# Altium PCB SkayboardRev2.PcbDoc
Units mil, origin at the board's own origin, x right, y up, seen from the top; angles counter-clockwise.
Board outline 13972.57 x 4222.54 mil, 2 copper layers (Top Layer, Bottom Layer); 100 components, 109 nets, 1014 pads, 162 vias.
Unrouted connection lines stored in the file: 145.
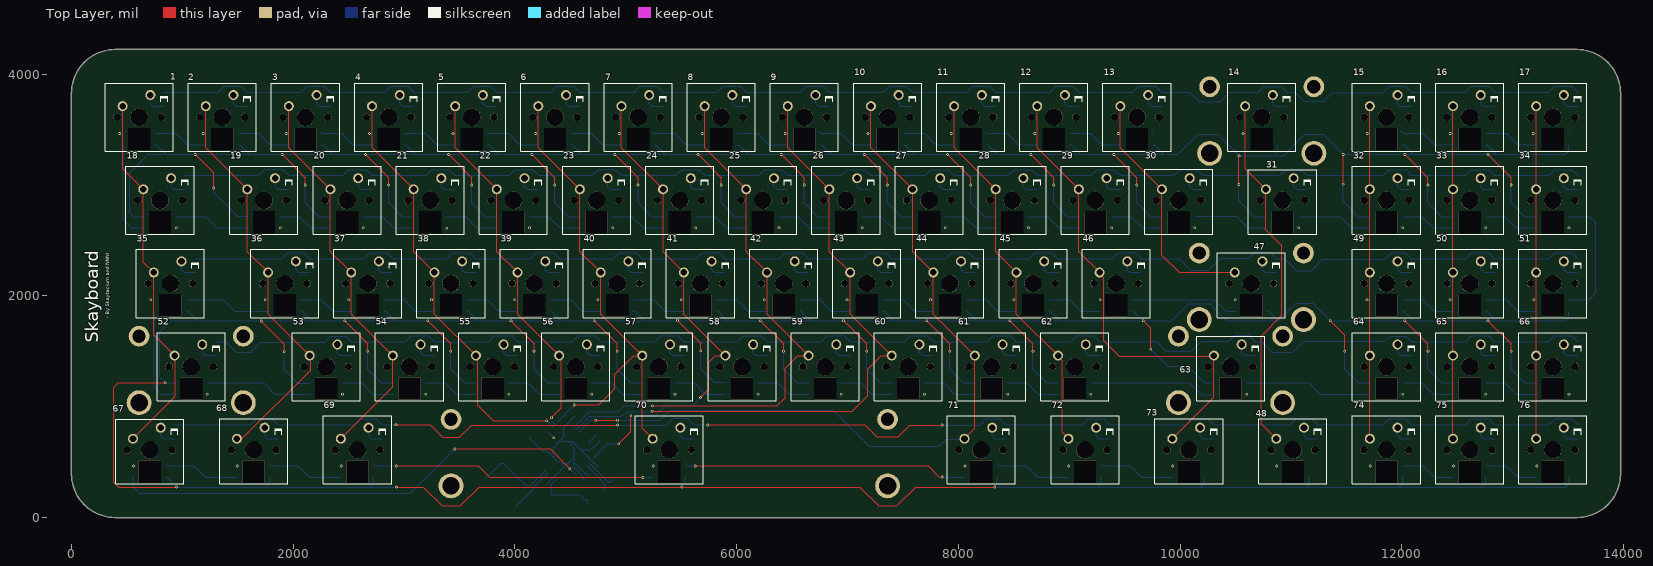
[diagram p0: Top Layer view]
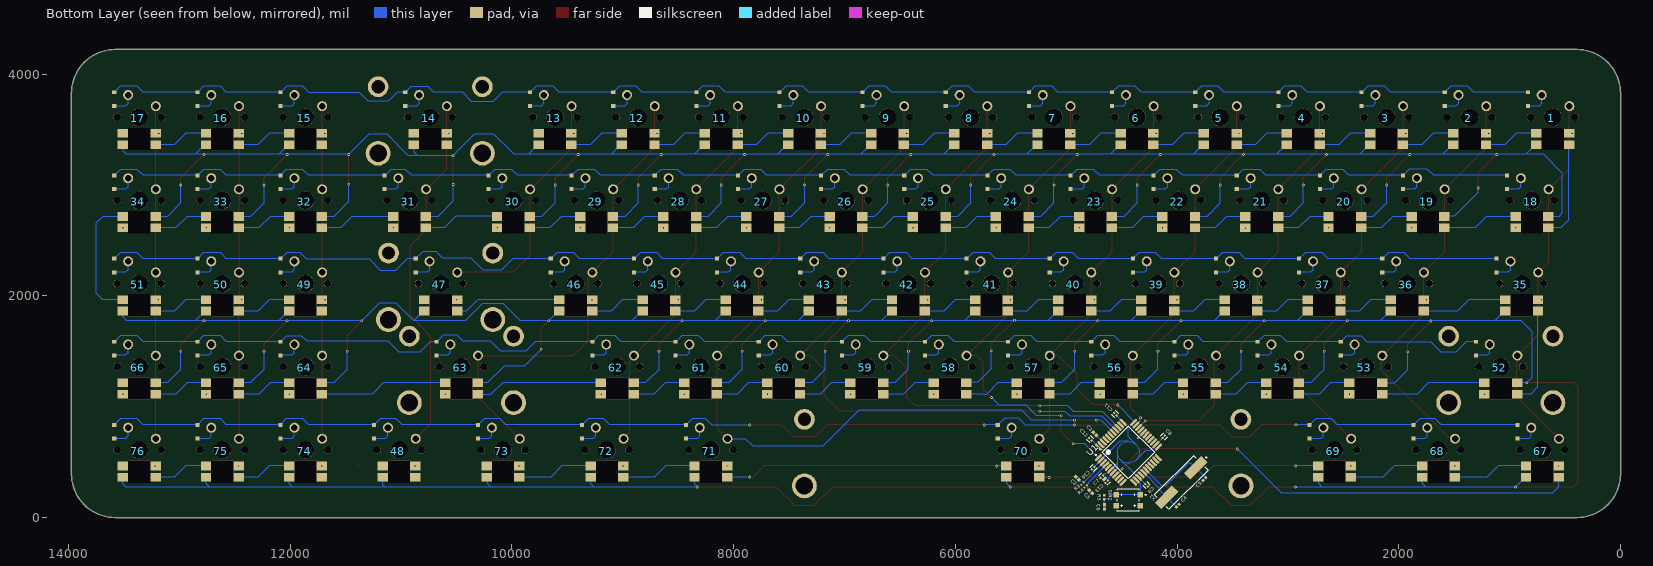
[diagram p1: Bottom Layer view, seen from below]

## Layer stack, top to bottom
Top Solder: solder mask 0.4, Solder Resist, Dk 3.5
Top Layer: signal copper 1.4
Dielectric 1: dielectric 12.6, FR-4, Dk 4.8
Bottom Layer: signal copper 1.4
Bottom Solder: solder mask 0.4, Solder Resist, Dk 3.5

## Board outline
58.09,188.06 42.95,215.02 30.04,243.12 19.35,272.1 10.94,301.83 4.92,332.15 1.29,362.86 0.04,393.78 0.09,3828.78 1.29,3859.71 4.92,3890.42 10.94,3920.74 19.35,3950.47 30.04,3979.52 42.95,4007.55 58.09,4034.52 75.23,4060.23 94.38,4084.52 115.38,4107.2 138.06,4128.22 162.37,4147.36 188.08,4164.52 215.04,4179.64 243.09,4192.55 272.12,4203.26 301.85,4211.65 332.18,4217.67 362.89,4221.33 393.81,4222.55 13578.87,4222.51 13609.73,4221.33 13640.44,4217.67 13670.75,4211.65 13700.52,4203.26 13729.5,4192.55 13757.57,4179.64 13784.53,4164.52 13810.24,4147.36 13834.5,4128.22 13857.25,4107.2 13878.24,4084.52 13897.33,4060.23 13914.53,4034.52 13929.69,4007.55 13942.61,3979.52 13953.31,3950.47 13961.62,3920.74 13967.76,3890.42 13971.35,3859.71 13972.61,3828.78 13972.61,393.78 13971.35,362.86 13967.76,332.15 13961.62,301.83 13953.31,272.1 13942.61,243.12 13929.69,215.02 13914.53,188.06 13897.33,162.34 13878.24,138.09 13857.25,115.36 13834.5,94.36 13810.24,75.21 13784.53,58.06 13757.57,42.93 13729.5,30.02 13700.52,19.33 13670.75,10.92 13640.44,4.9 13609.73,1.26 13578.87,0.01 393.81,0.07 362.89,1.26 332.18,4.9 301.85,10.92 272.12,19.33 243.09,30.02 215.04,42.93 188.08,58.06 162.37,75.21 138.06,94.36 115.38,115.36 94.38,138.09 75.23,162.34

## Design rules (kind name [scope] priority, off if disabled: settings)
BoardOutlineClearance [All] p1: gap=10 ignorepadtopadclearanceinfootprint=FALSE except(-1: Arc-OutlineEdge; 0: Arc-SplitContinuation Track-SplitContinuation SMDPad-SplitContinuation THPad-SplitContinuation Via-SplitContinuation Fill-SplitContinuation Poly-SplitContinuation Region-SplitContinuation Text-SplitContinuation)
Clearance [All] p1: gap=10 ignorepadtopadclearanceinfootprint=FALSE except(0: Arc-Hole Track-Hole SMDPad-Hole THPad-Hole Via-Hole Fill-Hole Poly-Hole Region-Hole Text-Hole)
PolygonConnect [All] p1: connectstyle=Relief reliefconductorwidth=10 reliefentries=4 polygonreliefangle="90 Angle" airgapwidth=10
RoutingVias [All] p1: holewidth=28 width=50 viastyle="Through Hole" minholewidth=28 minwidth=50 maxholewidth=28 maxwidth=50
SolderMaskExpansion [All] p1: expansion=4 istentingtop=FALSE
Width [All] p1: maxlimit=10 minlimit=10 preferedwidth=10
30 further rules are at their usual default settings.

## Components (designator, comment, footprint, x,y, rotation, side; value= is the part's Value field where it differs from the comment)
1 "Skey_LM" MX_RGB_Normal 611.29,3611.31 r0 top
2 "Skey_LM" MX_RGB_Normal 1361.31,3611.29 r0 top
3 "Skey_LM" MX_RGB_Normal 2111.31,3611.29 r0 top
4 "Skey_LM" MX_RGB_Normal 2861.31,3611.29 r0 top locked
5 "Skey_LM" MX_RGB_Normal 3611.31,3611.29 r0 top
6 "Skey_LM" MX_RGB_Normal 4361.25,3611.29 r0 top
7 "Skey_LM" MX_RGB_Normal 5111.29,3611.32 r0 top
8 "Skey_LM" MX_RGB_Normal 5861.33,3611.29 r0 top
9 "Skey_LM" MX_RGB_Normal 6611.33,3611.29 r0 top
10 "Skey_LM" MX_RGB_Normal 7361.33,3611.29 r0 top
11 "Skey_LM" MX_RGB_Normal 8111.33,3611.29 r0 top
12 "Skey_LM" MX_RGB_Normal 8861.33,3611.29 r0 top
13 "Skey_LM" MX_RGB_Normal 9611.33,3611.29 r0 top
14 "Skey_LM" MX_RGB_Normal 10736.33,3611.29 r0 top
15 "Skey_LM" MX_RGB_Normal 11861.33,3611.29 r0 top
16 "Skey_LM" MX_RGB_Normal 12611.3,3611.31 r0 top
17 "Skey_LM" MX_RGB_Normal 13361.33,3611.29 r0 top
18 "Skey" MX_RGB_Normal 798.78,2861.26 r0 top
19 "Skey" MX_RGB_Normal 1736.31,2861.29 r0 top
20 "Skey" MX_RGB_Normal 2486.31,2861.29 r0 top
21 "Skey" MX_RGB_Normal 3236.31,2861.29 r0 top
22 "Skey" MX_RGB_Normal 3986.32,2861.29 r0 top
23 "Skey" MX_RGB_Normal 4736.33,2861.29 r0 top
24 "Skey" MX_RGB_Normal 5486.33,2861.29 r0 top
25 "Skey" MX_RGB_Normal 6236.33,2861.29 r0 top
26 "Skey" MX_RGB_Normal 6986.33,2861.29 r0 top
27 "Skey" MX_RGB_Normal 7736.33,2861.29 r0 top
28 "Skey" MX_RGB_Normal 8486.33,2861.29 r0 top
29 "Skey" MX_RGB_Normal 9236.33,2861.29 r0 top
30 "Skey" MX_RGB_Normal 9986.33,2861.29 r0 top
31 "Skey" MX_RGB_Normal 10923.79,2861.27 r0 top
32 "Skey" MX_RGB_Normal 11861.33,2861.29 r0 top
33 "Skey" MX_RGB_Normal 12611.33,2861.29 r0 top
34 "Skey" MX_RGB_Normal 13361.33,2861.29 r0 top
35 "Skey_LM" MX_RGB_Normal 892.53,2111.25 r0 top
36 "Skey_LM" MX_RGB_Normal 1923.79,2111.26 r0 top
37 "Skey_LM" MX_RGB_Normal 2673.79,2111.26 r0 top
38 "Skey_LM" MX_RGB_Normal 3423.79,2111.26 r0 top
39 "Skey_LM" MX_RGB_Normal 4173.79,2111.26 r0 top
40 "Skey_LM" MX_RGB_Normal 4923.79,2111.27 r0 top
41 "Skey_LM" MX_RGB_Normal 5673.79,2111.27 r0 top
42 "Skey_LM" MX_RGB_Normal 6423.79,2111.27 r0 top
43 "Skey_LM" MX_RGB_Normal 7173.79,2111.27 r0 top
44 "Skey_LM" MX_RGB_Normal 7923.79,2111.27 r0 top
45 "Skey_LM" MX_RGB_Normal 8673.79,2111.27 r0 top
46 "Skey_LM" MX_RGB_Normal 9423.79,2111.27 r0 top
47 "Skey_LM" MX_RGB_Normal 10642.53,2111.27 r0 top
48 "Skey_LM" MX_RGB_Normal 11017.53,611.27 r0 top
49 "Skey_LM" MX_RGB_Normal 11861.33,2111.29 r0 top
50 "Skey_LM" MX_RGB_Normal 12611.33,2111.29 r0 top
51 "Skey_LM" MX_RGB_Normal 13361.33,2111.29 r0 top
52 "Skey" MX_RGB_Normal 1080.03,1361.26 r0 top
53 "Skey" MX_RGB_Normal 2298.79,1361.26 r0 top
54 "Skey" MX_RGB_Normal 3048.79,1361.26 r0 top
55 "Skey" MX_RGB_Normal 3798.79,1361.27 r0 top
56 "Skey" MX_RGB_Normal 4548.79,1361.27 r0 top
57 "Skey" MX_RGB_Normal 5298.79,1361.27 r0 top
58 "Skey" MX_RGB_Normal 6048.79,1361.27 r0 top
59 "Skey" MX_RGB_Normal 6798.79,1361.27 r0 top
60 "Skey" MX_RGB_Normal 7548.79,1361.27 r0 top
61 "Skey" MX_RGB_Normal 8298.79,1361.27 r0 top
62 "Skey" MX_RGB_Normal 9048.79,1361.27 r0 top
63 "Skey" MX_RGB_Normal 10455.05,1361.27 r0 top
64 "Skey" MX_RGB_Normal 11861.33,1361.29 r0 top
65 "Skey" MX_RGB_Normal 12611.33,1361.29 r0 top
66 "Skey" MX_RGB_Normal 13361.33,1361.29 r0 top
67 "Skey_LM" MX_RGB_Normal 705.03,611.26 r0 top
68 "Skey_LM" MX_RGB_Normal 1642.54,611.26 r0 top
69 "Skey_LM" MX_RGB_Normal 2580.04,611.26 r0 top
70 "Skey_LM" MX_RGB_Normal 5392.53,611.27 r0 top
71 "Skey_LM" MX_RGB_Normal 8205.05,611.27 r0 top
72 "Skey_LM" MX_RGB_Normal 9142.53,611.27 r0 top
73 "Skey_LM" MX_RGB_Normal 10080.05,611.27 r0 top
74 "Skey_LM" MX_RGB_Normal 11861.33,611.29 r0 top
75 "Skey_LM" MX_RGB_Normal 12611.33,611.29 r0 top
76 "Skey_LM" MX_RGB_Normal 13361.33,611.29 r0 top
C1 "100nF" CAPC1050X55X23ML05T13 4742.27,757.73 r225 bottom
C2 "47pF" CAPC1005X55X30ML05T10 4899.75,356.16 r45 bottom
C3 "47pF" CAPC1005X55X30ML05T10 4777.7,234.11 r45 bottom
C4 "22pF" CAPC1005X56X25NL10T15 3994.23,108.13 r315 bottom
C5 "22pF" CAPC1005X56X25NL10T15 3754.08,348.29 r135 bottom
C6 "100nF" CAPC1050X55X23ML05T13 4655.65,96.32 r270 bottom
C7 "100nF" FP-C0402-BB-MFG 4679.27,367.97 r315 bottom value="0.10 μF"
C8 "100nF" FP-C0402-BB-MFG 4120.22,730.17 r135 bottom value="0.10 μF"
C9 "100nF" FP-C0402-BB-MFG 4274.44,289.91 r225 bottom value="0.10 μF"
C10 "100nF" FP-C0402-BB-MFG 4758.01,446.71 r315 bottom value="0.10 μF"
C11 "100nF" FP-C0402-BB-MFG 4557.23,930.96 r45 bottom value="0.10 μF"
C12 "100nF" FP-C0402-BB-MFG 4781.64,706.55 r45 bottom value="0.10 μF"
C13 "100nF" FP-C0402-BB-MFG 4635.97,324.66 r315 bottom value="0.10 μF"
R3 "22R" RESC1005X40X25LL05T05 4852.5,308.92 r315 bottom
R4 "22R" RESC1005X40X25LL05T05 4824.94,281.36 r315 bottom
R5 "10K" RESC1005X40X25NL05T05 4655.65,182.93 r270 bottom
SW1 "7914G-1-000E" BOUR-7914G-1-000E_V 4439.12,155.37 r270 bottom
U1 "ATmega32U4-AU" 44ML_M 4439.12,588.44 r135 bottom
X1 "ABLS-8.000MHZ-B4-T" ABRA-ABLS-14.7456MHZ-B2-T_V 3962.74,316.79 r315 bottom
? "Comment" 1UStab 10736.33,3611.29 r0 top locked
? "Comment" 1UStab 10642.53,2111.27 r0 top locked
? "Comment" 1UStab 1080.03,1361.26 r0 top
? "Comment" 1UStab 10455.05,1361.27 r0 top locked
? "Comment" 6.25UStab 5392.53,611.27 r0 top locked

## Footprints (in the part's own frame and the unit in brackets; to place one, negate y for a bottom-side part, rotate by r counter-clockwise, add the part's x,y. Pads: shape width x height; smd on the part's side, far side on the other; paste and mask are expansions set on the pad)
1UStab [mil]
  round 224 hole 157: ""(-470,-325) ""(470,-325)
  round 187 hole 120: ""(-470,275) ""(470,275)
6.25UStab [mil]
  round 224 hole 157: ""(-1968.75,-325) ""(1968.75,-325)
  round 187 hole 120: ""(-1968.75,275) ""(1968.75,275)
44ML_M [mm] "Thin QFP, 44-Leads, Body 10x10mm, Pitch 0.8mm, IPC Low Density"
  oval 2.05x0.6 smd: 1(-5.7,4) 2(-5.7,3.2) 3(-5.7,2.4) 4(-5.7,1.6) 5(-5.7,0.8) 6(-5.7,0) 7(-5.7,-0.8) 8(-5.7,-1.6) 9(-5.7,-2.4) 10(-5.7,-3.2) 11(-5.7,-4) 23(5.7,-4) 24(5.7,-3.2) 25(5.7,-2.4) 26(5.7,-1.6) 27(5.7,-0.8) 28(5.7,0) 29(5.7,0.8) 30(5.7,1.6) 31(5.7,2.4) 32(5.7,3.2) 33(5.7,4)
  oval 0.6x2.05 smd: 12(-4,-5.7) 13(-3.2,-5.7) 14(-2.4,-5.7) 15(-1.6,-5.7) 16(-0.8,-5.7) 17(0,-5.7) 18(0.8,-5.7) 19(1.6,-5.7) 20(2.4,-5.7) 21(3.2,-5.7) 22(4,-5.7) 34(4,5.7) 35(3.2,5.7) 36(2.4,5.7) 37(1.6,5.7) 38(0.8,5.7) 39(0,5.7) 40(-0.8,5.7) 41(-1.6,5.7) 42(-2.4,5.7) 43(-3.2,5.7) 44(-4,5.7)
  silkscreen extent -5.82,-4.25 4.25,4.97, body extent -5,-5 5,5, height 1.2
ABRA-ABLS-14.7456MHZ-B2-T_V [mm] "SMD, 2-Leads, Body 11.4x4.7mm"
  rect 5.6x2.1 smd: 1(-4.75,0) 2(4.75,0)
  silkscreen extent -8.22,-2.35 6.35,2.35, body extent -6.35,-2.35 6.35,2.35, height 4.16
BOUR-7914G-1-000E_V [mm] "SMD, 4-Leads, Body 5x5mm, Height 4.49mm"
  rect 1.27x1.27 smd: 1(-1.27,2.75) 2(1.27,2.75) 3(1.27,-2.75) 4(-1.27,-2.75)
  silkscreen extent -2.5,-2.5 2.5,4.06, body extent -2.5,-3.1 2.5,3.1, height 4.11
CAPC1005X55X30ML05T10 [mm] "Chip Capacitor, 2-Leads, Body 1.00x0.50mm, IPC Low Density"
  rect 0.76x0.72 smd: 1(-0.48,0) 2(0.48,0)
  body extent -0.53,-0.28 0.53,0.27, height 0.55
CAPC1005X56X25NL10T15 [mm] "Chip Capacitor, 2-Leads, Body 1.00x0.50mm, IPC Medium Density"
  rect 0.68x0.64 smd: 1(-0.44,0) 2(0.44,0)
  body extent -0.55,-0.3 0.55,0.3, height 0.56
CAPC1050X55X23ML05T13 [mm] "Chip Capacitor, 2-Leads, Body 1.05x0.55mm, IPC Low Density"
  rect 0.76x0.72 smd: 1(-0.49,0) 2(0.49,0)
  body extent -0.53,-0.28 0.53,0.27, height 0.55
FP-C0402-BB-MFG [mm]
  rect 0.52x0.52 smd paste+0 mask+0: 1(-0.4,0) 2(0.4,0)
  silkscreen extent -0.5,-0.64 0.5,0.64, body extent -0.5,-0.25 0.5,0.25, height 0.55
MX_RGB_Normal [mm] "Skey's footprint"
  rect 2.5x2 smd far side: 1(-3.7,-3.7) 2(-3.7,-6.3) 3(3.7,-6.3) 4(3.7,-3.7)
  round 2.286 hole 1.499: 5(-3.81,2.54) ""(2.54,5.08)
  rect 0.95x0.9 smd far side: 6(5.715,5.715) ""(5.715,2.565)
  round 1.702 hole 1.702: ""(-5.08,0) ""(5.08,0)
  rect 5x5 hole 5 square: ""(0,-5)
  round 3.988 hole 3.988: ""(0,0)
  Bottom Layer lines w0.254: 2.54,5.08 2.54,3.175 3.15,2.565 5.715,2.565
  silkscreen extent -7.8,-7.8 7.8,7.8
RESC1005X40X25LL05T05 [mm] "Chip Resistor, 2-Leads, Body 1.00x0.50mm, IPC High Density"
  rect 0.45x0.45 smd: 1(-0.4,0) 2(0.4,0)
  body extent -0.53,-0.27 0.53,0.28, height 0.4
RESC1005X40X25NL05T05 [mm] "Chip Resistor, 2-Leads, Body 1.00x0.50mm, IPC Medium Density"
  rect 0.55x0.55 smd: 1(-0.45,0) 2(0.45,0)
  body extent -0.53,-0.27 0.53,0.28, height 0.4

## Part data
1 2 3 4 5 6 7 8 9 10 11 12 13 14 15 16 17 35 36 37 38 39 40 41 42 43 44 45 46 47 48 49 50 51 67 68 69 70 71 72 73 74 75 76: "Skey but the LED is mirrored"
18 19 20 21 22 23 24 25 26 27 28 29 30 31 32 33 34 52 53 54 55 56 57 58 59 60 61 62 63 64 65 66: "Skaytacium's keyboard's key's symbol"
C1 C6: library part CMP-2000-05439-1, "Chip Capacitor, 100 nF, +/- 10%, 16 V, -55 to 125 degC, 0402 (1005 Metric), RoHS, Tape and Reel", Capacitance=100000pF, Case Size/Dimension=0402, Dielectric=X7R, Manufacturer="Samsung Electro-Mechanics", Rated Voltage=16V, Tolerance (%)=±10%, Datasheet URL=https://datasheet.ciiva.com/29198/458718-da-01-en-vs-kondensator-0402-29198423.pdf, Datasheet Version=Nov-10, Manufacturer URL=http://www.samsungsem.com/global/index.jsp
C2 C3: library part CMP-2008-03283-1, Manufacturer=Kemet, Part Number=C0402C470J5GACTU
C4 C5: library part CMP-2008-02613-1, Manufacturer="AVX Interconnect / Elco", Part Number=04025A220JAT2A
C7 C8 C9 C10 C11 C12 C13: library part CMP-03020-023811-1, "CAP CER 0.1UF 10V X5R 0402", Capacitance="0.10 μF", Manufacturer=Kemet, Manufacturer Part Number=C0402C104K8PACTU, Package=C0402-BB, Temperature="-55°C to +125°C", Temperature Characteristic=X5R, Temperature Coefficient=15%, Temperature Range High=+125°C, Temperature Range Low=-55°C, Tolerance=0.1, Voltage Rating="10 V", Automotive=No, Category=Cap, ComponentLink2Description=Datasheet, ComponentLink2URL=https://content.kemet.com/datasheets/KEM_C1002_X7R_SMD.pdf, Device Class L1="Passive Components", Device Class L2=Capacitors, Device Class L3="Ceramic Capacitors", Digikey Description="CAP CER 0.1UF 10V X5R 0402", Height=0.55mm, Ipc Land Pattern Name=CAPC10050X50, Lead Free=Yes, Material=Ceramic, Mouser Description="Capacitor 100 nF 10 VDC 0402", Octopart=https://octopart.com/c0402c104k8pactu-kemet-140039, RoHS=TRUE
R3 R4: library part CMP-2002-08382-1, Manufacturer="Vishay Dale", Part Number=CRCW040222R0FKED
R5: library part CMP-2002-01183-1, Manufacturer=Panasonic, Part Number=ERT-J0ER103J
SW1: library part CMP-2000-05692-1, "SPST Gull Wing Sealed Key Switch, 100 mA, 16 V, -55 to 125 degC, 4-Pin SMD, RoHS, Tape and Reel", Actuator Color=N/A, Contact Rating @ Voltage=0.1A, Dielectric Strength=250VAC, Manufacturer=Bourns, Maximum AC Voltage Rating=16V, Maximum Contact Resistance=100mOhm, Minimum Insulation Resistance=100MOhm, Operating Force=2.94N, Operating Temperature=-55to125C, Package Description="4-Pin Surface Mount Device, Body 5 x 5 mm, Height 4.49 mm", Actuator Length=1.65mm, Actuator Style=RoundButton, Base Material=Thermoplastic, Body Orientation=Straight, Contact Material=Gold, Contact Plating=N/A, COO=TW, Datasheet URL=http://www.bourns.com/docs/Product-Datasheets/7914.pdf, Datasheet Version=08/2016, Dimension=5x6.2x4.19mm, ECCN=EAR99, Electrical Life=N/A, Family=7914, Ground Terminal=No, Housing Material=N/A, HTS=8536509065, Illumination Type=N/R, Manufacturer URL=http://www.bourns.com/, Maximum DC Voltage Rating=16V, Mechanical Life=100000Cycles, Mounting=SurfaceMount,GullWing, Mounting Technology=SurfaceMount, Package Reference=7914G-1-000E, Packaging=EmbossedTapeandReel, Part No=7914G-1-000E, Pole Throw Configuration=SPST, Product Weight=N/A, RoHS=Yes, Seal Description=N/A, Seal Location=N/A, Supplier=Bourns, Switch Configuration=N.O., Type=KeySwitch
U1: library part CMP-0095-00285-2, "8-bit AVR Microcontroller, 2.7-5.5V, 16MHz, 32KB Flash, 1KB EEPROM, 2.5KB SRAM, USB Controller, 44-pin TQFP, Industrial Grade (-40°C to 85°C), Ext Osc", ComponentLink1Description="Manufacturer URL", ComponentLink1URL=http://www.atmel.com/, ComponentLink2Description="ATmega16U4/32U4 Datasheet", ComponentLink2URL=http://www.atmel.com/dyn/resources/prod_documents/doc7766.pdf, ComponentLink3Description="ATmega16U4 ATmega32U4 Summary", ComponentLink3URL=http://www.atmel.com/dyn/resources/prod_documents/7766S.pdf, DatasheetVersion="revF, Nov-2010", PackageDescription="44-Pin Plastic Thin Quad Flat Pack, 10 x 10 x 1.0 mm Body, 0.8 mm Pitch (TQFP)", PackageReference=44ML, PackageVersion="rev.G, Jul-2007", RevisionNote="DatasheetVersion updated. URLs added."
X1: library part CMP-2000-05726-1, "Low Profile Crystal, 8.0 MHz, +/- 30 ppm, -20 to 70 degC, 2-Pin SMD, RoHS, Tape and Reel", Case Height=4.2mm, Case Length=11.4mm, Case Width=4.7mm, Frequency=8MHz, Frequency Stability=50PPM, Load Capacitance=18pF, Manufacturer=ABRACON, Operating Temperature Range=-20Cto+70C, Package / Case=HC-49/US, Package Description="2-Pin Surface Mount Device, Body 11.4 x 4.7 mm", Package Reference=ABLS-14.7456MHZ-B2-T, Tolerance=30PPM, Brand=ABRACON, Datasheet URL=http://www.abracon.com/Resonators/abls.pdf, Datasheet Version=04/2011, Dimensions=4.7mmWx11.4mmLx4.2mmH, ESR=80Ohms, Factory Pack Quantity=1000, Manufacturer URL=http://www.abracon.com/, Mounting Style=SMD/SMT, Mounting Technology=SurfaceMount, Package URL=http://www.abracon.com/Support/PackageDrawing/Resonators/ABLS-2D.pdf, Packaging=Reel, Product Category=Crystals, RoHS=Details, Series=ABLS, Termination Style=SMD/SMT, Type=LowProfileMicroprocessorCrystal

## Via types
v1: diameter 24, hole 12, Top Layer to Bottom Layer, 162 vias

## Nets (pads, with @x,y where several pads share a name; then routed paths per layer and width w, separated by ;. In a path a pad name is that pad's centre, name@x,y a point inside that pad or via, vN(x,y) a via of type N, cw(c..) or ccw(c..) an arc to the next point about the centre after c; other vN are vias at no path point)
+5: C7.1 C8.1 C9.1 C10.1 C11.1 C12.1 C13.1 R5.1 U1.2 U1.6 U1.7 U1.14 U1.24 U1.34 U1.44 | length 2678.2
  Bottom Layer w9.84: 4537.54,588.44 ccw(c4439.12,588.44) 4537.54,588.44
  Bottom Layer w10: C8.1 4131.35,718.54 4191.35,658.54 U1.24 4247.03,602.36 4286.42,602.36 4371.93,516.85 ; C9.1 4285.57,301.16 4347.25,362.83 U1.14 4350.93,362.95 4422.04,434.06 4423.64,434.06 4513.01,523.43 ; 4368.03,656.41 4440.94,729.33 4440.94,812.98 U1.34 4486.44,859.33 4546.09,918.98 C11.1 ; 4439.96,686.86 4518.86,686.86 4595.97,609.75 ; 4537.54,588.44 4537.4,588.3 4537.4,489.88 ; C13.1 4624.83,343.2 4612.34,355.69 4612.34,367.97 4575.53,404.79 U1.7 4575.53,409.52 4537.4,447.65 4537.4,489.88 ; C7.1 4651.71,395.53 4635.72,395.53 4601.48,429.76 U1.6 4537.54,490.02 4537.4,489.88 ; C10.1 4746.88,458.35 4686.88,518.34 U1.2 4595.97,609.75 ; C12.1 4769.65,695.42 4710,635.77 U1.44 4705.47,635.77 4679.45,609.75 4595.97,609.75
GND: 1.1 2.1 3.1 4.1 5.1 6.1 7.1 8.1 9.1 10.1 11.1 12.1 13.1 14.1 15.1 16.1 17.1 18.3 19.3 20.3 21.3 22.3 23.3 24.3 25.3 26.3 27.3 28.3 29.3 30.3 31.3 32.3 33.3 34.3 35.1 36.1 37.1 38.1 39.1 40.1 41.1 42.1 43.1 44.1 45.1 46.1 47.1 48.1 49.1 50.1 51.1 52.3 53.3 54.3 55.3 56.3 57.3 58.3 59.3 60.3 61.3 62.3 63.3 64.3 65.3 66.3 67.1 68.1 69.1 70.1 71.1 72.1 73.1 74.1 75.1 76.1 C1.1 C2.2 C3.1 C4.1 C5.1 C6.2 C7.2 C8.2 C9.2 C10.2 C11.2 C12.2 C13.2 SW1.2 SW1.3 U1.5 U1.15 U1.23 U1.35 U1.43
  other v1: 559.37,465.59 1496.87,465.59 2434.37,465.6 5246.86,465.6 8059.38,465.6 8996.86,465.6 9934.38,465.6 10871.86,465.6 11715.66,465.62 12465.66,465.62 13215.66,465.62 1225.7,1113.23 2444.46,1113.23 3194.46,1113.23 3944.46,1113.23 4694.46,1113.24 5444.46,1113.24 6194.46,1113.24 6944.46,1113.24 7694.46,1113.24 8444.46,1113.24 9194.46,1113.24 10600.72,1113.24 12006.99,1113.26 12756.99,1113.26 13506.99,1113.26 716.54,1964.57 1748.03,1964.57 2500,1964.57 3248.03,1964.57 4000,1964.57 4748.03,1964.57 5500,1964.57 6248.03,1964.57 6996.06,1964.57 7748.03,1964.57 8500,1964.57 11685.04,1964.57 12437.01,1964.57 13188.98,1964.57 9278.12,1965.6 10496.86,1965.6 3385.83,2610.24 944.45,2613.22 1881.98,2613.25 2631.98,2613.25 4131.99,2613.26 4881.99,2613.25 5631.99,2613.25 6381.99,2613.25 7131.99,2613.25 7881.99,2613.25 8631.99,2613.25 9381.99,2613.25 10131.99,2613.25 11069.46,2613.23 12006.99,2613.25 12756.99,2613.25 13506.99,2613.25 437.01,3464.57 1188.98,3464.57 1937.01,3464.57 2688.98,3464.57 3440.94,3464.57 4188.98,3464.57 4940.94,3464.57 5688.98,3464.57 6437.01,3464.57 7185.04,3464.57 7937.01,3464.57 8688.98,3464.57 9440.94,3464.57 10566.93,3464.57 11688.98,3464.57 12437.01,3464.57 13185.04,3464.57
Net1_2: 1.2 18.2 | length 895.3
  Bottom Layer w10: 1.2 465.62,2687.93 539.37,2614.17 652.17,2614.17 18.2 ; 1506.98,3465.62 1508.03,3464.57
Net1_4: 1.4 2.2 | length 502
  Bottom Layer w10: 1.4 939.87,3465.64 1043.31,3362.2 1214.6,3362.2 2.2
Net1_5: 1.5 18.5 35.5 52.5 67.5 U1.29 | length 3424
  Top Layer w10: 1.5 461.29,3148.75 18.5 648.78,2305 35.5 742.53,1648.76 937.01,1454.28 937.01,1093.23 67.5
  Bottom Layer w10: U1.29 4302.71,768.78 4350.39,721.09 v1(4350.39,720.47)
Net1_6: 1.6 2.6 3.6 4.6 5.6 6.6 7.6 8.6 9.6 10.6 11.6 12.6 13.6 14.6 15.6 16.6 17.6 U1.27 | length 13579.5
  Bottom Layer w10: 1.6 1324.5,3836.31 1377.95,3889.76 1531.85,3889.76 2.6@1585.33,3836.29 ; 2.6 2.6@1585.33,3836.29 ; 3.6@2334.37,3836.26 2280.9,3889.74 2127,3889.74 2073.54,3836.29 2.6@1585.33,3836.29 ; 3.6 2824.53,3836.29 2877.98,3889.74 3031.88,3889.74 4.6@3085.36,3836.26 ; 4.6 3574.53,3836.29 3627.98,3889.74 3781.88,3889.74 3835.36,3836.26 4323.57,3836.26 4377.03,3889.71 4530.92,3889.71 6.6@4584.4,3836.24 ; 6.6 5074.46,3836.29 5127.91,3889.74 5281.81,3889.74 7.6@5335.29,3836.26 ; 7.6 5824.5,3836.32 5877.95,3889.78 6031.85,3889.78 6085.33,3836.3 6573.55,3836.3 6627,3889.75 6780.9,3889.75 9.6@6834.38,3836.27 ; 9.6 7324.54,3836.29 7377.99,3889.74 7531.89,3889.74 10.6@7585.37,3836.26 ; 10.6 8074.54,3836.29 8127.99,3889.74 8281.89,3889.74 11.6@8335.37,3836.26 ; 11.6 8824.54,3836.29 8877.99,3889.74 9031.89,3889.74 12.6@9085.37,3836.26 ; 12.6 9574.54,3836.29 9627.99,3889.74 9781.89,3889.74 13.6@9835.37,3836.26 ; 13.6 10088.91,3836.29 10173.23,3751.97 10362.2,3751.97 10444.88,3834.65 10704.72,3834.65 10755.91,3885.83 10910.8,3885.83 10960.34,3836.29 14.6 11033.79,3836.29 11114.17,3755.91 11295.28,3755.91 11370.08,3830.71 11826.77,3830.71 11885.83,3889.76 12031.86,3889.76 12085.34,3836.29 15.6 12574.54,3836.29 12627.99,3889.74 12781.89,3889.74 16.6@12835.37,3836.26 ; 16.6 13324.51,3836.31 13377.97,3889.77 13531.86,3889.77 17.6@13585.34,3836.29
Net2_4: 2.4 3.2 | length 500.5
  Bottom Layer w10: 2.4 1689.9,3465.62 1793.34,3362.18 3.2@1964.62,3362.18
Net2_5: 2.5 19.5 36.5 53.5 68.5 U1.30 | length 3729.2
  Top Layer w10: 2.5 1211.31,3336.29 19.5 1586.31,2398.73 36.5 1773.79,1836.26 2157.48,1452.57 2157.48,1330.71 1546.68,719.91 1501.18,719.91 68.5
  Bottom Layer w10: 1180.03,1561.26 1180.66,1560.63 ; 2397.91,1560.39 2398.79,1561.26 ; 2680.04,811.26 2681.37,812.6 ; 5491.44,812.36 5492.53,811.27 5493.85,812.6 ; 8303.96,812.36 8305.05,811.27 ; 9148.79,1561.27 9153.36,1556.69 ; 9711.33,3811.29 9712.64,3812.6 ; 10550.23,1556.45 10555.05,1561.27 10555.69,1560.63 ; 10742.28,2311.02 10742.53,2311.27 10743.86,2312.6 ; 10835.25,3812.36 10836.33,3811.29 10837.64,3812.6 ; 11960.25,2312.36 11961.33,2311.29 ; 11960.25,3812.36 11961.33,3811.29 ; 11960.42,1560.39 11961.33,1561.29
Net3_4: 3.4 4.2 | length 500.5
  Bottom Layer w10: 3.4 2439.9,3465.62 2543.34,3362.18 4.2@2714.62,3362.18
Net3_5: 3.5 20.5 37.5 54.5 69.5 U1.12 | length 3582.5
  Top Layer w10: 3.5 1961.31,3336.29 20.5 2336.31,2398.73 37.5 2523.79,1836.26 54.5 2898.79,1180.01 69.5
Net4_4: 4.4 5.2 | length 500.5
  Bottom Layer w10: 4.4@3008.03,3464.57 3190.95,3464.57 3294.39,3361.13 5.2@3465.67,3361.13
Net4_5: 4.5 21.5 38.5 55.5 U1.31 | length 3858
  Top Layer w10: 4.5 2711.31,3336.29 21.5 3086.31,2398.73 38.5 3273.79,1836.27 3664.1,1445.96 3664.1,1416.66 3665.35,1415.41 3665.35,1011.81 3803.38,873.78 v1(4286.67,873.78)
  Bottom Layer w10: v1@4287.4,874.02 4287.4,873.78 U1.31
Net5_4: 5.4 6.2 | length 500.5
  Bottom Layer w10: 5.4 3939.9,3465.62 4043.34,3362.18 6.2@4214.62,3362.18
Net5_5: 5.5 22.5 39.5 56.5 U1.32 | length 3323.3
  Top Layer w10: 5.5 3461.31,3336.3 22.5 3836.32,2398.73 39.5 4023.79,1836.27 4414.09,1445.96 4414.09,1418.64 4417.32,1415.41 4417.32,988.92 v1(4329.98,901.57)
  Bottom Layer w10: v1@4330.71,901.57 4330.71,875.02 U1.32
Net6_4: 6.4 7.2 | length 500.5
  Bottom Layer w10: 6.4 4689.83,3465.62 4793.27,3362.18 7.2@4964.56,3362.18
Net6_5: 6.5 23.5 40.5 57.5 70.5 U1.33 | length 4503.2
  Top Layer w10: 6.5 4211.25,3336.36 23.5 4586.33,2398.73 40.5 4773.79,1836.27 57.5 ; v1(4535.43,1015.75) 4755.91,1015.75 4901.57,1161.42 4901.57,1291.34 5071.51,1461.27 57.5 ; 70.5 5148.79,805.01 57.5
  Bottom Layer w10: U1.33 4389.43,860.84 4389.43,869.74 4523.62,1003.94
Net7_4: 7.4 8.2 | length 500.5
  Bottom Layer w10: 7.4 5439.87,3465.66 5543.31,3362.22 8.2@5714.6,3362.22
Net7_5: 7.5 24.5 41.5 58.5 U1.1 | length 4431.7
  Top Layer w10: v1(4936.27,665.35) 5043.31,772.39 v1(5043.31,917.32) ; 7.5 4961.29,3336.32 24.5 5336.33,2398.73 41.5 5523.79,1836.27 58.5 5807.73,1461.27 5748.03,1401.57 5748.03,1157.48 v1(5673.23,1082.68)
  Bottom Layer w10: U1.1 4833.39,665.35 v1(4936.27,665.35) v1@4937.01,665.35 ; v1(5043.31,917.32) 5263.78,917.32 5358.27,1011.81 5602.36,1011.81 v1@5668.96,1078.41
Net8_4: 8.4 9.2 | length 500.5
  Bottom Layer w10: 8.4@6007.52,3465.09 6190.44,3465.09 6293.87,3361.66 9.2@6465.16,3361.66
Net8_5: 8.5 25.5 42.5 59.5 U1.36 | length 5182.2
  Top Layer w10: v1(5240.16,1007.87) 6362.2,1007.87 6437.01,1082.68 6437.01,1346.46 6551.82,1461.27 59.5 6273.79,1836.27 42.5 6086.33,2398.73 25.5 5711.33,3336.29 8.5
  Bottom Layer w10: U1.36@4534.41,813.94 U1.36 4669.8,952.76 4933.07,952.76 4988.19,1007.87 v1(5240.16,1007.87)
Net9_4: 9.4 10.2 | length 500.5
  Bottom Layer w10: 9.4 6939.91,3465.62 7043.35,3362.18 10.2@7214.64,3362.18
Net9_5: 9.5 26.5 43.5 60.5 U1.37 | length 5901.9
  Top Layer w10: v1(5238.19,958.66) 7041.34,958.66 7181.1,1098.43 7181.1,1338.58 7303.15,1460.63 7398.15,1460.63 60.5 7023.79,1836.27 43.5 6836.33,2398.73 26.5 6461.33,3336.29 9.5
  Bottom Layer w10: U1.37 4555.45,791.67 4677.17,913.39 4964.57,913.39 5007.87,956.69 5236.22,956.69 v1(5238.19,958.66)
Net10_4: 10.4 11.2 | length 500.5
  Bottom Layer w10: 10.4@7507.52,3465.09 7690.44,3465.09 7793.87,3361.66 11.2@7965.16,3361.66
Net10_5: 10.5 27.5 44.5 61.5 71.5 U1.38 | length 7151.7
  Top Layer w10: v1(4728.35,877.95) v1(4925.2,877.95) ; 10.5 7211.33,3336.29 27.5 7586.33,2398.73 44.5 7773.79,1836.27 61.5 8148.79,805.01 71.5
  Bottom Layer w10: U1.38 4684.08,877.95 v1@4726.76,877.95 ; v1(4925.2,877.95) 5311.02,877.95 5401.57,968.5 6870.08,968.5 7196.85,641.73 7822.83,641.73 7889.76,708.66 8052.44,708.66 71.5
Net11_4: 11.4 12.2 | length 500.5
  Bottom Layer w10: 11.4 8439.91,3465.62 8543.35,3362.18 12.2@8714.64,3362.18
Net11_5: 11.5 28.5 45.5 62.5 72.5 U1.39 | length 3427.2
  Top Layer w10: 11.5 7961.33,3336.29 28.5 8336.33,2398.73 45.5 8523.79,1836.27 62.5 8898.79,1449.57 8935.36,1412.99 8935.36,768.44 72.5
Net12_4: 12.4 13.2 | length 500.5
  Bottom Layer w10: 12.4@9008.04,3464.57 9190.96,3464.57 9294.4,3361.13 13.2@9465.69,3361.13
Net12_5: 12.5 29.5 46.5 63.5 73.5 U1.18 | length 4323.5
  Top Layer w10: 12.5 8711.33,3336.29 29.5 9086.33,2398.73 46.5 9273.79,2199.56 9310.36,2162.99 9310.36,1595.15 9448.82,1456.69 10300.47,1456.69 63.5 10305.05,1086.27 73.5
Net13_4: 13.4 14.2
Net13_5: 13.5 30.5 47.5 U1.19 | length 2219.5
  Top Layer w10: 13.5 9461.33,3336.29 30.5 9836.33,2368.4 9993.46,2211.27 47.5
Net14_4: 14.4 15.2
Net14_5: 14.5 31.5 48.5 U1.20 | length 3271.8
  Top Layer w10: 14.5 10586.33,3148.73 31.5 10773.79,2596.35 10918.12,2452.02 10918.12,1824.38 10730.64,1636.9 10730.64,848.16 48.5
Net15_4: 15.4 16.2 | length 500.5
  Bottom Layer w10: 15.4 12189.91,3465.62 12293.35,3362.18 16.2@12464.64,3362.18
Net15_5: 15.5 32.5 49.5 64.5 74.5 U1.21 | length 3000
  Top Layer w10: 74.5 64.5 49.5 32.5 15.5
Net16_4: 16.4 17.2 | length 500.5
  Bottom Layer w10: 16.4 12939.88,3465.64 13043.32,3362.21 17.2@13214.61,3362.21
Net16_5: 16.5 33.5 50.5 65.5 75.5 U1.25 | length 3000
  Top Layer w10: 75.5 16.5
Net17_5: 17.5 34.5 51.5 66.5 76.5 U1.22 | length 3000
  Top Layer w10: 76.5 66.5 51.5 34.5 17.5
Net18_4: 18.4 19.2 | length 688.2
  Bottom Layer w10: 18.4 1210.68,2715.59 1312.09,2614.17 19.2@1590.64,2614.17
Net18_6: 18.6 19.6 20.6 21.6 22.6 23.6 24.6 25.6 26.6 27.6 28.6 29.6 30.6 31.6 32.6 33.6 34.6 U1.9 | length 13245.2
  Bottom Layer w10: 18.6 1686.26,3086.26 1741.74,3141.73 1905.51,3141.73 1947.61,3099.63 1947.61,3099 1953.42,3093.19 19.6@1954.05,3093.19 ; 19.6 2449.53,3086.29 2502.98,3139.74 2656.88,3139.74 2710.36,3086.26 3198.57,3086.26 3252.03,3139.71 3405.92,3139.71 21.6@3459.4,3086.24 ; 21.6 3949.53,3086.29 4002.98,3139.74 4156.88,3139.74 22.6@4210.36,3086.26 ; 22.6 4699.53,3086.29 4752.99,3139.74 4906.89,3139.74 23.6@4960.36,3086.27 ; 23.6 5449.54,3086.29 5502.99,3139.74 5656.89,3139.74 24.6@5710.37,3086.26 ; 24.6 6199.54,3086.29 6252.99,3139.74 6406.89,3139.74 25.6@6460.37,3086.26 ; 25.6 6949.54,3086.29 7002.99,3139.74 7156.89,3139.74 26.6@7210.37,3086.26 ; 26.6 7699.54,3086.29 7752.99,3139.74 7906.89,3139.74 27.6@7960.37,3086.26 ; 27.6 8449.54,3086.29 8502.99,3139.74 8656.89,3139.74 28.6@8710.37,3086.26 ; 28.6 9199.54,3086.29 9252.99,3139.74 9406.89,3139.74 9460.37,3086.26 9948.58,3086.26 10002.04,3139.71 10155.94,3139.71 30.6@10209.42,3086.24 ; 30.6@10210.37,3086.26 10905.16,3086.26 10958.61,3139.71 11092.57,3139.71 11133.3,3098.98 11135.09,3098.98 11144.29,3089.77 31.6@11144.29,3087.99 ; 31.6@11147.83,3086.24 11834.27,3086.24 11887.73,3139.69 12037.47,3139.69 12072.62,3104.54 12072.62,3099 12085.34,3086.29 32.6 ; 32.6@12092.81,3086.29 12574.54,3086.29 12627.99,3139.74 12781.89,3139.74 12835.37,3086.26 13323.58,3086.26 13377.04,3139.71 13530.94,3139.71 34.6@13584.42,3086.24
Net19_4: 19.4 20.2 | length 499.8
  Bottom Layer w10: 19.4 2055.04,2715.62 2156.48,2614.17 20.2@2339.73,2614.17
Net20_4: 20.4 21.2 | length 499.8
  Bottom Layer w10: 20.4 2805.04,2715.62 2906.48,2614.17 21.2@3089.73,2614.17
Net21_4: 21.4 22.2 | length 499.8
  Bottom Layer w10: 21.4 3555.05,2715.62 3656.49,2614.18 22.2@3839.73,2614.18
Net22_4: 22.4 23.2 | length 499.8
  Bottom Layer w10: 22.4 4305.05,2715.62 4406.5,2614.17 23.2@4589.74,2614.17
Net23_4: 23.4 24.2 | length 499.8
  Bottom Layer w10: 23.4 5055.05,2715.62 5156.5,2614.17 24.2@5339.74,2614.17
Net24_4: 24.4 25.2 | length 499.8
  Bottom Layer w10: 24.4 5805.05,2715.62 5906.5,2614.17 25.2@6089.74,2614.17
Net25_4: 25.4 26.2 | length 499.8
  Bottom Layer w10: 25.4 6555.05,2715.62 6656.5,2614.17 26.2@6839.74,2614.17
Net26_4: 26.4 27.2 | length 499.8
  Bottom Layer w10: 26.4 7305.05,2715.62 7406.5,2614.17 27.2@7589.74,2614.17
Net27_4: 27.4 28.2 | length 499.8
  Bottom Layer w10: 27.4 8055.05,2715.62 8156.5,2614.17 28.2@8339.74,2614.17
Net28_4: 28.4 29.2 | length 499.8
  Bottom Layer w10: 28.4 8805.05,2715.62 8906.5,2614.17 29.2@9089.74,2614.17
Net29_4: 29.4 30.2 | length 499.8
  Bottom Layer w10: 29.4 9555.05,2715.62 9656.5,2614.17 30.2@9839.74,2614.17
Net30_4: 30.4 31.2 | length 687.5
  Bottom Layer w10: 30.4@10131.99,2716.29 10508.11,2716.29 10610.26,2614.15 31.2@10777.2,2614.15
Net31_4: 31.4 32.2 | length 686.7
  Bottom Layer w10: 31.4@11069.46,2714.2 11443.28,2714.2 11543.31,2614.17 32.2@11714.74,2614.17
Net32_4: 32.4 33.2 | length 499.8
  Bottom Layer w10: 32.4 12180.05,2715.62 12281.5,2614.17 33.2@12464.74,2614.17
Net33_4: 33.4 34.2 | length 501.1
  Bottom Layer w10: 33.4 12930.05,2715.62 13031.5,2614.17 13214.74,2614.17 34.2
Net34_4: 34.4 51.4 | length 1164.9
  Bottom Layer w10: 51.4 13508.04,1964.57 13688.98,1964.57 13748.03,2023.62 13748.03,2657.48 13689.9,2715.62 34.4
Net35_2: 35.2 52.2 | length 899.4
  Bottom Layer w10: 35.2 746.87,1178.33 811.02,1114.17 933.42,1114.17 52.2
Net35_4: 35.4 36.2 | length 783.2
  Bottom Layer w10: 35.4 1369.06,1965.58 1472.44,1862.2 1777.1,1862.2 36.2
Net35_6: 35.6 36.6 37.6 38.6 39.6 40.6 41.6 42.6 43.6 44.6 45.6 46.6 47.6 49.6 50.6 51.6 U1.10 | length 13304.4
  Bottom Layer w10: 35.6 1895.31,2336.25 1948.76,2389.71 2095.34,2389.71 2135.09,2349.96 2135.09,2348.97 2147.8,2336.26 2637,2336.26 2690.45,2389.71 2844.35,2389.71 37.6@2897.83,2336.23 ; 37.6 3387,2336.26 3440.45,2389.71 3594.35,2389.71 38.6@3647.83,2336.23 ; 38.6 4137,2336.26 4190.45,2389.71 4344.35,2389.71 39.6@4397.83,2336.23 ; 39.6 4887,2336.26 4940.46,2389.72 5094.36,2389.72 40.6@5147.84,2336.24 ; 40.6 5637,2336.27 5690.45,2389.72 5844.35,2389.72 41.6@5897.83,2336.24 ; 41.6 6387,2336.27 6440.45,2389.72 6594.35,2389.72 42.6@6647.83,2336.24 ; 42.6 7137,2336.27 7190.45,2389.72 7344.35,2389.72 43.6@7397.83,2336.24 ; 43.6 7887,2336.27 7940.45,2389.72 8094.35,2389.72 44.6@8147.83,2336.24 ; 44.6 8637,2336.27 8690.45,2389.72 8844.35,2389.72 45.6@8897.83,2336.24 ; 45.6 9387,2336.27 9440.45,2389.72 9594.35,2389.72 46.6@9647.83,2336.24 ; 46.6 9990.51,2336.27 10094.49,2232.28 10259.84,2232.28 10366.14,2338.58 10622.05,2338.58 10681.1,2397.64 10805.17,2397.64 10866.54,2336.27 47.6 10943.26,2336.27 11051.18,2228.35 11181.1,2228.35 11283.46,2330.71 11850.39,2330.71 11909.45,2389.76 12031.86,2389.76 12085.34,2336.29 49.6 12574.54,2336.29 12627.99,2389.74 12781.89,2389.74 12835.37,2336.26 13323.58,2336.26 13377.04,2389.71 13530.94,2389.71 51.6@13584.42,2336.24
Net36_4: 36.4 37.2 | length 500.5
  Bottom Layer w10: 36.4 2252.37,1965.59 2355.81,1862.15 37.2@2527.1,1862.15
Net37_4: 37.4 38.2 | length 500.5
  Bottom Layer w10: 37.4 3002.37,1965.59 3105.81,1862.15 38.2@3277.1,1862.15
Net38_4: 38.4 39.2 | length 500.5
  Bottom Layer w10: 38.4 3752.37,1965.59 3855.81,1862.15 39.2@4027.1,1862.15
Net39_4: 39.4 40.2 | length 500.5
  Bottom Layer w10: 39.4 4502.38,1965.59 4605.81,1862.16 40.2@4777.1,1862.16
Net40_4: 40.4 41.2 | length 500.5
  Bottom Layer w10: 40.4 5252.37,1965.6 5355.81,1862.16 41.2@5527.1,1862.16
Net41_4: 41.4 42.2 | length 500.5
  Bottom Layer w10: 41.4 6002.37,1965.6 6105.81,1862.16 42.2@6277.1,1862.16
Net42_4: 42.4 43.2 | length 500.5
  Bottom Layer w10: 42.4 6752.37,1965.6 6855.81,1862.16 43.2@7027.1,1862.16
Net43_4: 43.4 44.2 | length 500.5
  Bottom Layer w10: 43.4 7502.37,1965.6 7605.81,1862.16 44.2@7777.1,1862.16
Net44_4: 44.4 45.2 | length 500.5
  Bottom Layer w10: 44.4 8252.37,1965.6 8355.81,1862.16 45.2@8527.1,1862.16
Net45_4: 45.4 46.2 | length 500.5
  Bottom Layer w10: 45.4 9002.37,1965.6 9105.81,1862.16 46.2@9277.1,1862.16
Net46_4: 46.4 47.2 | length 970.7
  Bottom Layer w10: 46.4 10306.06,1965.6 10409.45,1862.2 10495.83,1862.2 47.2
Net47_4: 47.4 48.2
Net48_4: 48.4 49.2 | length 1.5
  Bottom Layer w10: 11388.73,465.6 11389.76,464.57
Net48_6: 48.6 67.6 68.6 69.6 70.6 71.6 72.6 73.6 74.6 75.6 76.6 U1.28 | length 13287.5
  Top Layer w10: v1(2927.17,836.61) 3238.19,836.61 3350.39,724.41 3500,724.41 3610.24,834.65 v1(4925.2,834.65) ; v1(5738.19,835.63) 7156.5,835.63 7263.78,728.35 7456.69,728.35 7562.99,834.65 v1(7855.32,834.65)
  Bottom Layer w10: 67.6 1615.79,836.26 1669.24,889.71 1813.1,889.71 68.6@1867.05,835.77 ; 68.6 2553.29,836.26 2606.74,889.72 2750.61,889.72 69.6@2804.55,835.78 ; 69.6 2805.39,836.61 v1(2927.17,836.61) ; v1(4925.2,834.65) 5366.14,834.65 5429.13,897.64 5555.18,897.64 5616.54,836.27 70.6 v1@5738.19,836.27 ; v1(7855.32,834.65) 8192.91,834.65 8251.97,893.7 8371.63,893.7 8429.06,836.27 71.6 9115.8,836.27 9169.25,889.72 9313.12,889.72 72.6@9367.05,835.79 ; 72.6 10053.28,836.27 10106.73,889.72 10250.6,889.72 73.6@10304.55,835.77 ; 73.6 10990.8,836.27 11044.25,889.72 11188.12,889.72 48.6@11242.05,835.79 ; 48.6 11832.33,836.27 11885.79,889.72 12039.41,889.72 12072.62,856.51 12072.62,849.01 74.6@12082.73,838.9 ; 74.6 12574.54,836.29 12627.99,889.74 12781.89,889.74 75.6@12835.37,836.27 ; 75.6 13324.54,836.29 13377.99,889.74 13531.89,889.74 76.6@13585.37,836.27
Net49_4: 49.4 50.2 | length 500.5
  Bottom Layer w10: 49.4 12189.91,1965.62 12293.35,1862.18 50.2@12464.64,1862.18
Net50_4: 50.4 51.2 | length 500.5
  Bottom Layer w10: 50.4 12939.91,1965.62 13043.35,1862.18 51.2@13214.64,1862.18
Net52_4: 52.4 53.2 | length 969.8
  Bottom Layer w10: 52.4 1733.23,1215.59 1834.65,1114.17 2152.17,1114.17 53.2
Net52_6: 52.6 53.6 54.6 55.6 56.6 57.6 58.6 59.6 60.6 61.6 62.6 63.6 64.6 65.6 66.6 U1.11 | length 13117
  Bottom Layer w10: 52.6 1390.12,1586.26 1484.25,1492.13 1618.11,1492.13 1708.66,1582.68 2283.46,1582.68 2334.65,1633.86 2475.21,1633.86 2522.8,1586.26 53.6 3012,1586.26 3065.45,1639.72 3219.35,1639.72 54.6@3272.83,1586.24 ; 54.6 3762,1586.26 3815.45,1639.72 3969.35,1639.72 55.6@4022.83,1586.24 ; 55.6 4512,1586.27 4565.46,1639.72 4719.36,1639.72 56.6@4772.84,1586.24 ; 56.6 5262,1586.27 5315.45,1639.72 5469.35,1639.72 57.6@5522.83,1586.24 ; 57.6 6012,1586.27 6065.45,1639.72 6219.35,1639.72 58.6@6272.83,1586.24 ; 58.6 6762,1586.27 6815.45,1639.72 6969.35,1639.72 59.6@7022.83,1586.24 ; 59.6 7512,1586.27 7565.45,1639.72 7719.35,1639.72 60.6@7772.83,1586.24 ; 60.6 8262,1586.27 8315.45,1639.72 8469.35,1639.72 61.6@8522.83,1586.24 ; 61.6 9012,1586.27 9065.45,1639.72 9219.35,1639.72 62.6@9272.83,1586.24 ; 62.6 9787.75,1586.27 9874.02,1500 10098.43,1500 10188.98,1590.55 10437.01,1590.55 10492.13,1645.67 10619.66,1645.67 10679.06,1586.27 63.6 10684.69,1586.27 10685.04,1586.61 10736.22,1586.61 10830.71,1492.13 11015.75,1492.13 11114.17,1590.55 11846.46,1590.55 11893.7,1637.8 12033.84,1637.8 12085.34,1586.29 64.6 12574.54,1586.29 12627.99,1639.74 12781.89,1639.74 65.6@12835.37,1586.26 ; 65.6 13324.54,1586.29 13377.99,1639.74 13531.89,1639.74 66.6@13585.37,1586.26
Net53_4: 53.4 54.2 | length 499.8
  Bottom Layer w10: 53.4 2617.51,1215.59 2718.96,1114.15 54.2@2902.2,1114.15
Net54_4: 54.4 55.2 | length 499.8
  Bottom Layer w10: 54.4 3367.52,1215.6 3468.96,1114.15 55.2@3652.2,1114.15
Net55_4: 55.4 56.2 | length 499.8
  Bottom Layer w10: 55.4 4117.51,1215.6 4218.96,1114.16 56.2@4402.2,1114.16
Net56_4: 56.4 57.2 | length 499.8
  Bottom Layer w10: 56.4 4867.51,1215.6 4968.96,1114.16 57.2@5152.2,1114.16
Net57_4: 57.4 58.2 | length 499.8
  Bottom Layer w10: 57.4 5617.51,1215.6 5718.96,1114.16 58.2@5902.2,1114.16
Net58_4: 58.4 59.2 | length 499.8
  Bottom Layer w10: 58.4 6367.51,1215.6 6468.96,1114.16 59.2@6652.2,1114.16
Net59_4: 59.4 60.2 | length 499.8
  Bottom Layer w10: 59.4 7117.51,1215.6 7218.96,1114.16 60.2@7402.2,1114.16
Net60_4: 60.4 61.2 | length 499.8
  Bottom Layer w10: 60.4 7867.51,1215.6 7968.96,1114.16 61.2@8152.2,1114.16
Net61_4: 61.4 62.2 | length 499.8
  Bottom Layer w10: 61.4 8617.51,1215.6 8718.96,1114.16 62.2@8902.2,1114.16
Net62_4: 62.4 63.2 | length 1163.1
  Bottom Layer w10: 62.4 10083.61,1215.6 10192.91,1106.3 10302.44,1106.3 63.2
Net63_4: 63.4 64.2 | length 1155.7
  Bottom Layer w10: 63.4@10600.72,1214.73 11159.28,1214.73 11259.84,1114.18 64.2@11714.74,1114.18
Net64_4: 64.4 65.2 | length 499.8
  Bottom Layer w10: 64.4 12180.05,1215.62 12281.5,1114.18 65.2@12464.74,1114.18
Net65_4: 65.4 66.2 | length 499.8
  Bottom Layer w10: 65.4 12930.05,1215.62 13031.5,1114.18 66.2@13214.74,1114.18
Net66_4: 66.4 76.4
Net67_2: 67.2 U1.8 | length 4365.6
  Top Layer w10: v1(3456.53,619.04) 4317.97,619.04 v1(4496.06,440.94)
  Bottom Layer w10: 67.2 559.37,279.22 618.11,220.47 3055.12,220.47 v1@3456.69,622.05 ; v1(4496.06,440.94) 4496.8,440.94 4552.52,385.22 U1.8
Net67_4: 67.4 68.2 | length 689.4
  Bottom Layer w10: 67.4 1101.34,465.59 1204.72,362.2 1495.84,362.2 68.2
Net68_4: 68.4 69.2 | length 690.9
  Bottom Layer w10: 68.4 2042.28,465.59 2145.67,362.2 2433.34,362.2 69.2 ; 69.2@2432.54,361.4 69.2@2433.57,362.43
Net69_4: 69.4 70.2 | length 2564.4
  Top Layer w10: v1(2929.13,465.55) 3668.31,465.55 3771.65,362.2 v1(5154.53,362.2)
  Bottom Layer w10: 69.4 v1(2929.13,465.55) ; v1(5154.53,362.2) 5245.82,362.2 70.2
Net70_4: 70.4 71.2 | length 2563.6
  Top Layer w10: v1(5625.98,465.55) 7727.36,465.55 7826.77,366.14 v1(7855.32,366.14)
  Bottom Layer w10: 70.4 v1(5625.98,465.55) ; v1(7855.32,366.14) 8056.47,366.14 71.2
Net71_4: 71.4 72.2 | length 685.5
  Bottom Layer w10: 71.4 8614.4,465.6 8717.79,362.2 72.2@8991.95,362.2 ; 72.2@8995.85,362.22 72.2
Net72_4: 72.4 73.2 | length 688.6
  Bottom Layer w10: 72.4 9548.28,465.6 9650.64,363.24 73.2
Net73_4: 73.4 74.2
Net74_4: 74.4 75.2 | length 500.5
  Bottom Layer w10: 74.4 12189.91,465.62 12293.35,362.18 75.2@12464.64,362.18
Net75_4: 75.4 76.2 | length 500.5
  Bottom Layer w10: 75.4 12939.91,465.62 13043.35,362.18 76.2@13214.64,362.18
NetC1_2: C1.2 U1.42 | length 94.4
  Bottom Layer w10: U1.42 4666.7,680.31 4730.48,744.09 C1.2@4732.56,744.09
NetC2_1: C2.1 R3.1 U1.3 | length 304.3
  Bottom Layer w10: U1.3 4664.73,496.57 4841.25,320.05 R3.1 4846.82,320.05 4855.37,328.6 4872.19,328.6 C2.1
NetC3_2: C3.2 R4.1 U1.4 | length 307.3
  Bottom Layer w10: U1.4 4797.38,319.26 4797.38,308.92 R4.1 4813.81,289.91 4805.26,281.36 4805.26,261.67 C3.2
NetC4_2: C4.2 U1.16 X1.2 | length 434.3
  Bottom Layer w10: C4.2 4094.97,184.37 X1.2 4159.59,249.17 4159.59,264.37 U1.16
NetC5_2: C5.2 U1.17 X1.1 | length 733.6
  Bottom Layer w10: C5.2 3830.32,449.02 X1.1 3835.13,449.02 3876.12,490.02 3899.75,490.02 4100.53,289.23 4139.9,289.23 U1.17
NetC6_1: C6.1 R5.2 SW1.1 SW1.4 U1.13 | length 544
  Bottom Layer w10: U1.13 4328.88,300.04 4328.88,207.34 SW1.1 SW1.4 4585.97,205.37 4626.12,165.21 R5.2 C6.1
NetR3_2: R3.2
NetR4_2: R4.2
VCC: 1.3 2.3 3.3 4.3 5.3 6.3 7.3 8.3 9.3 10.3 11.3 12.3 13.3 14.3 15.3 16.3 17.3 18.1 19.1 20.1 21.1 22.1 23.1 24.1 25.1 26.1 27.1 28.1 29.1 30.1 31.1 32.1 33.1 34.1 35.3 36.3 37.3 38.3 39.3 40.3 41.3 42.3 43.3 44.3 45.3 46.3 47.3 48.3 49.3 50.3 51.3 52.1 53.1 54.1 55.1 56.1 57.1 58.1 59.1 60.1 61.1 62.1 63.1 64.1 65.1 66.1 67.3 68.3 69.3 70.3 71.3 72.3 73.3 74.3 75.3 76.3 | length 71339.5
  Top Layer w10: v1(846.46,1216.54) 421.26,1216.54 381.89,1177.17 381.89,318.9 425.2,275.59 v1(948.18,275.59) ; v1(1118.11,3275.59) 1283.46,3110.24 v1(1283.46,2972.44) ; v1(1710.54,1772.57) 1919.2,1563.91 v1(1919.2,1496.98) ; v1(2464.05,1775.57) 2672.71,1566.91 v1(2672.71,1499.98) ; v1(2651.57,3275.59) 2860.24,3066.93 v1(2860.24,3000) ; v1(2931.35,275.59) 3173.23,275.59 3342.52,106.3 3507.87,106.3 3677.17,275.59 v1(5503.94,275.59) 7110.51,275.59 7279.8,106.3 7445.16,106.3 7614.45,275.59 v1(8326.77,275.59) ; v1(3214.05,1775.57) 3422.71,1566.91 v1(3422.71,1499.98) ; v1(3401.58,3275.6) 3610.24,3066.93 v1(3610.24,3000.01) ; v1(3964.05,1775.57) 4172.71,1566.91 v1(4172.71,1499.98) ; v1(4151.59,3275.59) 4360.25,3066.93 v1(4360.25,3000) ; v1(4714.05,1775.57) 4922.71,1566.91 v1(4922.71,1499.98) ; v1(4901.59,3275.59) 5110.25,3066.93 v1(5110.25,3000) ; v1(5466.44,1780.45) 5675.1,1571.79 v1(5675.1,1504.86) ; v1(5651.59,3275.59) 5860.25,3066.93 v1(5860.25,3000) ; v1(6214.05,1775.57) 6422.71,1566.91 v1(6422.71,1499.98) ; v1(6401.59,3275.59) 6610.25,3066.93 v1(6610.25,3000) ; v1(6964.05,1775.57) 7172.71,1566.91 v1(7172.71,1499.98) ; v1(7151.59,3275.59) 7360.25,3066.93 v1(7360.25,3000) ; v1(7714.05,1775.57) 7922.71,1566.91 v1(7922.71,1499.98) ; v1(7901.59,3275.59) 8110.25,3066.93 v1(8110.25,3000) ; v1(8464.05,1775.57) 8672.71,1566.91 v1(8672.71,1499.98) ; v1(8651.59,3275.59) 8860.25,3066.93 v1(8860.25,3000) ; v1(9401.59,3275.59) 9610.25,3066.93 v1(9610.25,3000) ; v1(9666.93,1775.6) 9736.22,1706.31 v1(9736.22,1519.68) ; v1(10527.56,3003.94) 10527.56,3259.84 v1(10531.5,3263.78) ; v1(11354.33,1775.59) 11485.25,1644.67 v1(11485.25,1500) ; v1(11472.44,3007.87) v1(11472.44,3275.59) ; v1(12026.59,1775.59) 12235.25,1566.93 v1(12235.25,1500) ; v1(12026.59,3275.59) 12235.25,3066.93 v1(12235.25,3000) ; v1(12776.59,1775.59) 12985.25,1566.93 v1(12985.25,1500) ; v1(12776.59,3275.59) 12985.25,3066.93 v1(12985.25,3000)
  Bottom Layer w10: 18.1 556.07,2715.59 523.62,2748.03 523.62,3106.3 692.96,3275.64 854.43,3275.64 ; 1.3 766.8,3363.28 854.43,3275.64 ; 67.3 860.55,363.23 v1(948.18,275.59) 1751.97,275.59 ; 52.1 922.21,1215.59 921.26,1216.54 v1(846.46,1216.54) 795.28,1267.72 795.28,1677.17 893.7,1775.59 1135.68,1775.59 1048.05,1863.22 35.3 ; 1135.68,1775.59 2166.93,1775.59 ; v1(1283.46,2972.44) 1283.46,2933.07 1500,2716.54 1589.72,2716.54 19.1 ; 2.3 1516.83,3363.25 1604.44,3275.64 ; 1658.22,3275.62 5354.43,3275.62 ; 1658.22,3275.64 1604.44,3275.64 ; 68.3 1787.4,362.43 1787.4,311.02 1751.97,275.59 ; v1(1919.2,1496.98) 1919.2,1335.57 2042.16,1212.6 53.1@2149.61,1212.6 ; 36.3 2079.3,1863.23 2166.93,1775.59 ; v1(2110.24,3000) 2110.24,2838.58 2233.2,2715.62 20.1 ; 3.3 2266.83,3363.25 2354.46,3275.62 ; v1(2672.71,1499.98) 2672.71,1338.56 2795.68,1215.59 54.1 ; 69.3@2724.91,362.43 2724.1,361.62 2724.1,310.22 2689.47,275.59 ; 37.3 2829.3,1863.23 2916.93,1775.59 ; v1(2860.24,3000) 2860.24,2838.58 2983.2,2715.62 21.1 ; v1(2931.35,275.59) 2689.47,275.59 ; 4.3 3016.83,3363.25 3104.46,3275.62 ; v1(3422.71,1499.98) 3422.71,1338.56 3545.68,1215.6 55.1 ; 38.3 3579.3,1863.23 3666.93,1775.59 ; v1(3610.24,3000.01) 3610.24,2838.59 3733.21,2715.62 22.1 ; 5.3 3766.83,3363.25 3854.46,3275.62 ; v1(4172.71,1499.98) 4172.71,1338.57 4295.68,1215.6 56.1 ; 39.3 4329.3,1863.23 4416.94,1775.59 ; v1(4360.25,3000) 4360.25,2838.58 4483.21,2715.62 23.1 ; 6.3 4516.76,3363.25 4604.4,3275.62 ; v1(4922.71,1499.98) 4922.71,1338.57 5045.68,1215.6 57.1 ; 40.3 5079.3,1863.23 5166.93,1775.6 ; v1(5110.25,3000) 5110.25,2838.58 5233.21,2715.62 24.1 ; 7.3 5266.8,3363.29 5354.43,3275.66 6104.43,3275.66 ; v1(5503.94,275.59) 5538.2,309.85 70.3 ; v1(5675.1,1504.86) 5675.1,1343.44 5798.07,1220.47 58.1@5905.51,1220.47 ; 41.3 5829.3,1863.23 5916.93,1775.6 ; v1(5860.25,3000) 5860.25,2838.58 5983.21,2715.62 25.1 ; 8.3 6016.84,3363.25 6104.43,3275.66 ; 6158.22,3275.62 9854.33,3275.62 ; 6158.22,3275.66 6104.43,3275.66 ; v1(6422.71,1499.98) 6422.71,1338.57 6545.68,1215.6 59.1 ; 42.3 6579.3,1863.23 6666.93,1775.6 ; v1(6610.25,3000) 6610.25,2838.58 6733.21,2715.62 26.1 ; 9.3 6766.84,3363.25 6854.47,3275.62 ; v1(7172.71,1499.98) 7172.71,1338.57 7295.68,1215.6 60.1 ; 43.3 7329.3,1863.23 7416.93,1775.6 ; v1(7360.25,3000) 7360.25,2838.58 7483.21,2715.62 27.1 ; 10.3 7516.84,3363.25 7604.47,3275.62 ; v1(7922.71,1499.98) 7922.71,1338.57 8045.68,1215.6 61.1 ; 44.3 8079.3,1863.23 8166.93,1775.6 ; v1(8110.25,3000) 8110.25,2838.58 8233.21,2715.62 28.1 ; 11.3 8266.84,3363.25 8354.47,3275.62 ; 71.3 8350.39,362.92 8350.39,299.21 v1(8326.77,275.59) 9255.91,275.59 ; v1(8672.71,1499.98) 8672.71,1338.57 8795.68,1215.6 62.1 ; 45.3 8829.3,1863.23 8916.93,1775.6 ; v1(8860.25,3000) 8860.25,2838.58 8983.21,2715.62 29.1 ; 12.3 9016.84,3363.25 9104.47,3275.62 ; 72.3 9287.4,362.44 9287.4,307.09 9255.91,275.59 ; 46.3 9579.3,1863.23 v1(9666.93,1775.6) ; v1(9610.25,3000) 9610.25,2838.58 9733.21,2715.62 30.1 ; v1(9736.22,1519.68) 9889.76,1366.14 10070.87,1366.14 10221.41,1215.6 63.1 ; 13.3 9766.84,3363.25 9854.33,3275.76 9854.33,3275.62 ; 73.3@10216.54,362.44 10216.54,307.09 10185.04,275.59 ; v1(10527.56,3003.94) 10527.56,2858.71 10670.68,2715.6 31.1 ; 47.3 10798.04,1863.23 10885.67,1775.6 ; 14.3 10881.89,3363.15 10881.89,3295.28 10850.39,3263.78 ; 48.3 11163.2,297.05 11141.73,275.59 ; v1(11472.44,3007.87) 11472.44,2851.39 11608.21,2715.62 32.1 ; v1(11485.25,1500) 11485.25,1338.59 11608.21,1215.62 64.1 ; 74.3 12006.99,306.21 11976.38,275.59 ; 49.3 12016.84,1863.25 12104.47,1775.62 ; 15.3 12016.84,3363.25 12104.47,3275.62 ; v1(12235.25,1500) 12235.25,1338.59 12358.21,1215.62 65.1 ; v1(12235.25,3000) 12235.25,2838.58 12358.21,2715.62 33.1 ; 16.3 12766.81,3363.28 12854.45,3275.64 ; 75.3 12755.91,362.17 12755.91,307.09 12724.41,275.59 ; 50.3 12766.84,1863.25 12854.47,1775.62 ; 12908.26,3275.62 12104.47,3275.62 ; 12908.26,3275.64 13476.43,3275.64 13506.99,3306.21 17.3 ; v1(12985.25,1500) 12985.25,1338.59 13108.21,1215.62 66.1 ; v1(12985.25,3000) 12985.25,2838.58 13108.21,2715.62 34.1 ; 76.3 13507.87,362.38 13507.87,307.09 13476.38,275.59 12724.41,275.59 ; 51.3 13506.99,1810.14 13472.47,1775.62 12104.47,1775.62 ; 854.43,3275.64 1604.44,3275.64 ; 1751.97,275.59 2689.47,275.59 ; 2166.93,1775.59 4416.94,1775.59 ; 4416.94,1775.59 5166.93,1775.59 ; 5166.93,1775.6 9925.2,1775.6 10078.74,1929.13 10267.72,1929.13 10421.26,1775.59 10885.67,1775.59 ; 9255.91,275.59 10185.04,275.59 ; 9854.33,3275.62 9980.34,3275.62 10161.42,3456.69 10338.58,3456.69 v1(10531.5,3263.78) 10850.39,3263.78 ; 10185.04,275.59 11141.73,275.59 ; 10850.39,3263.78 10933.07,3263.78 11125.98,3456.69 11291.34,3456.69 v1(11472.44,3275.59) v1(12026.59,3275.59) 12104.45,3275.59 ; 10885.67,1775.6 11043.15,1933.07 11196.85,1933.07 v1(11354.33,1775.59) 12104.47,1775.59 ; 11141.73,275.59 11976.38,275.59 ; 11976.38,275.59 12724.41,275.59
  other v1: 1901.57,3275.59
pads on no net: 1. 2. 3. 4. 5. 6. 7. 8. 9. 10. 11. 12. 13. 14. 15. 16. 17. 17.4 18. 19. 20. 21. 22. 23. 24. 25. 26. 27. 28. 29. 30. 31. 32. 33. 34. 35. 36. 37. 38. 39. 40. 41. 42. 43. 44. 45. 46. 47. 48. 49. 50. 51. 52. 53. 54. 55. 56. 57. 58. 59. 60. 61. 62. 63. 64. 65. 66. 67. 68. 69. 70. 71. 72. 73. 74. 75. 76. ?. U1.26 U1.40 U1.41
copper on no net: | length 571.4
  Top Layer w10: 1901.57,3275.59 2110.24,3066.93 2110.24,3000
  Bottom Layer w10: 2240.16,3482.44 2256.98,3465.62 ; 3006.98,3465.62 3008.03,3464.57 ; 3740.16,3482.44 3756.98,3465.62 ; 4506.92,3465.62 4507.97,3464.57 ; 5240.09,3482.44 5256.92,3465.62 ; 6006.99,3465.62 6008.04,3464.57 ; 6740.17,3482.44 6756.99,3465.62 ; 7506.99,3465.62 7508.04,3464.57 ; 8240.17,3482.44 8256.99,3465.62 ; 9006.99,3465.62 9008.04,3464.57 ; 9740.17,3482.44 9756.99,3465.62 ; 10881.99,3465.62 10883.04,3464.57 ; 11984.25,3488.36 12006.99,3465.62 ; 12756.97,3465.64 12758.02,3464.59 ; 13490.14,3482.47 13506.97,3465.64

## Silkscreen, mask and mechanical layers (free items; w line width, h text height)
Top Overlay:
  text "- By Skaytacium and NNNI" at 355.64,1800.03 h59.06 r90
  text "Skayboard" at 283.56,1578.38 h196.85 r90
Mechanical 1:
  the board outline again, w0.5